# Altium PCB EP2C5T144C8.PcbDoc (part 1 of 2)
Units mm, origin at the board's own origin, x right, y up, seen from the top; angles counter-clockwise.
Board outline 85 x 80 mm, 2 copper layers (Top Layer, Bottom Layer); 74 components, 125 nets, 468 pads, 116 vias.
Unrouted connection lines stored in the file: 2.
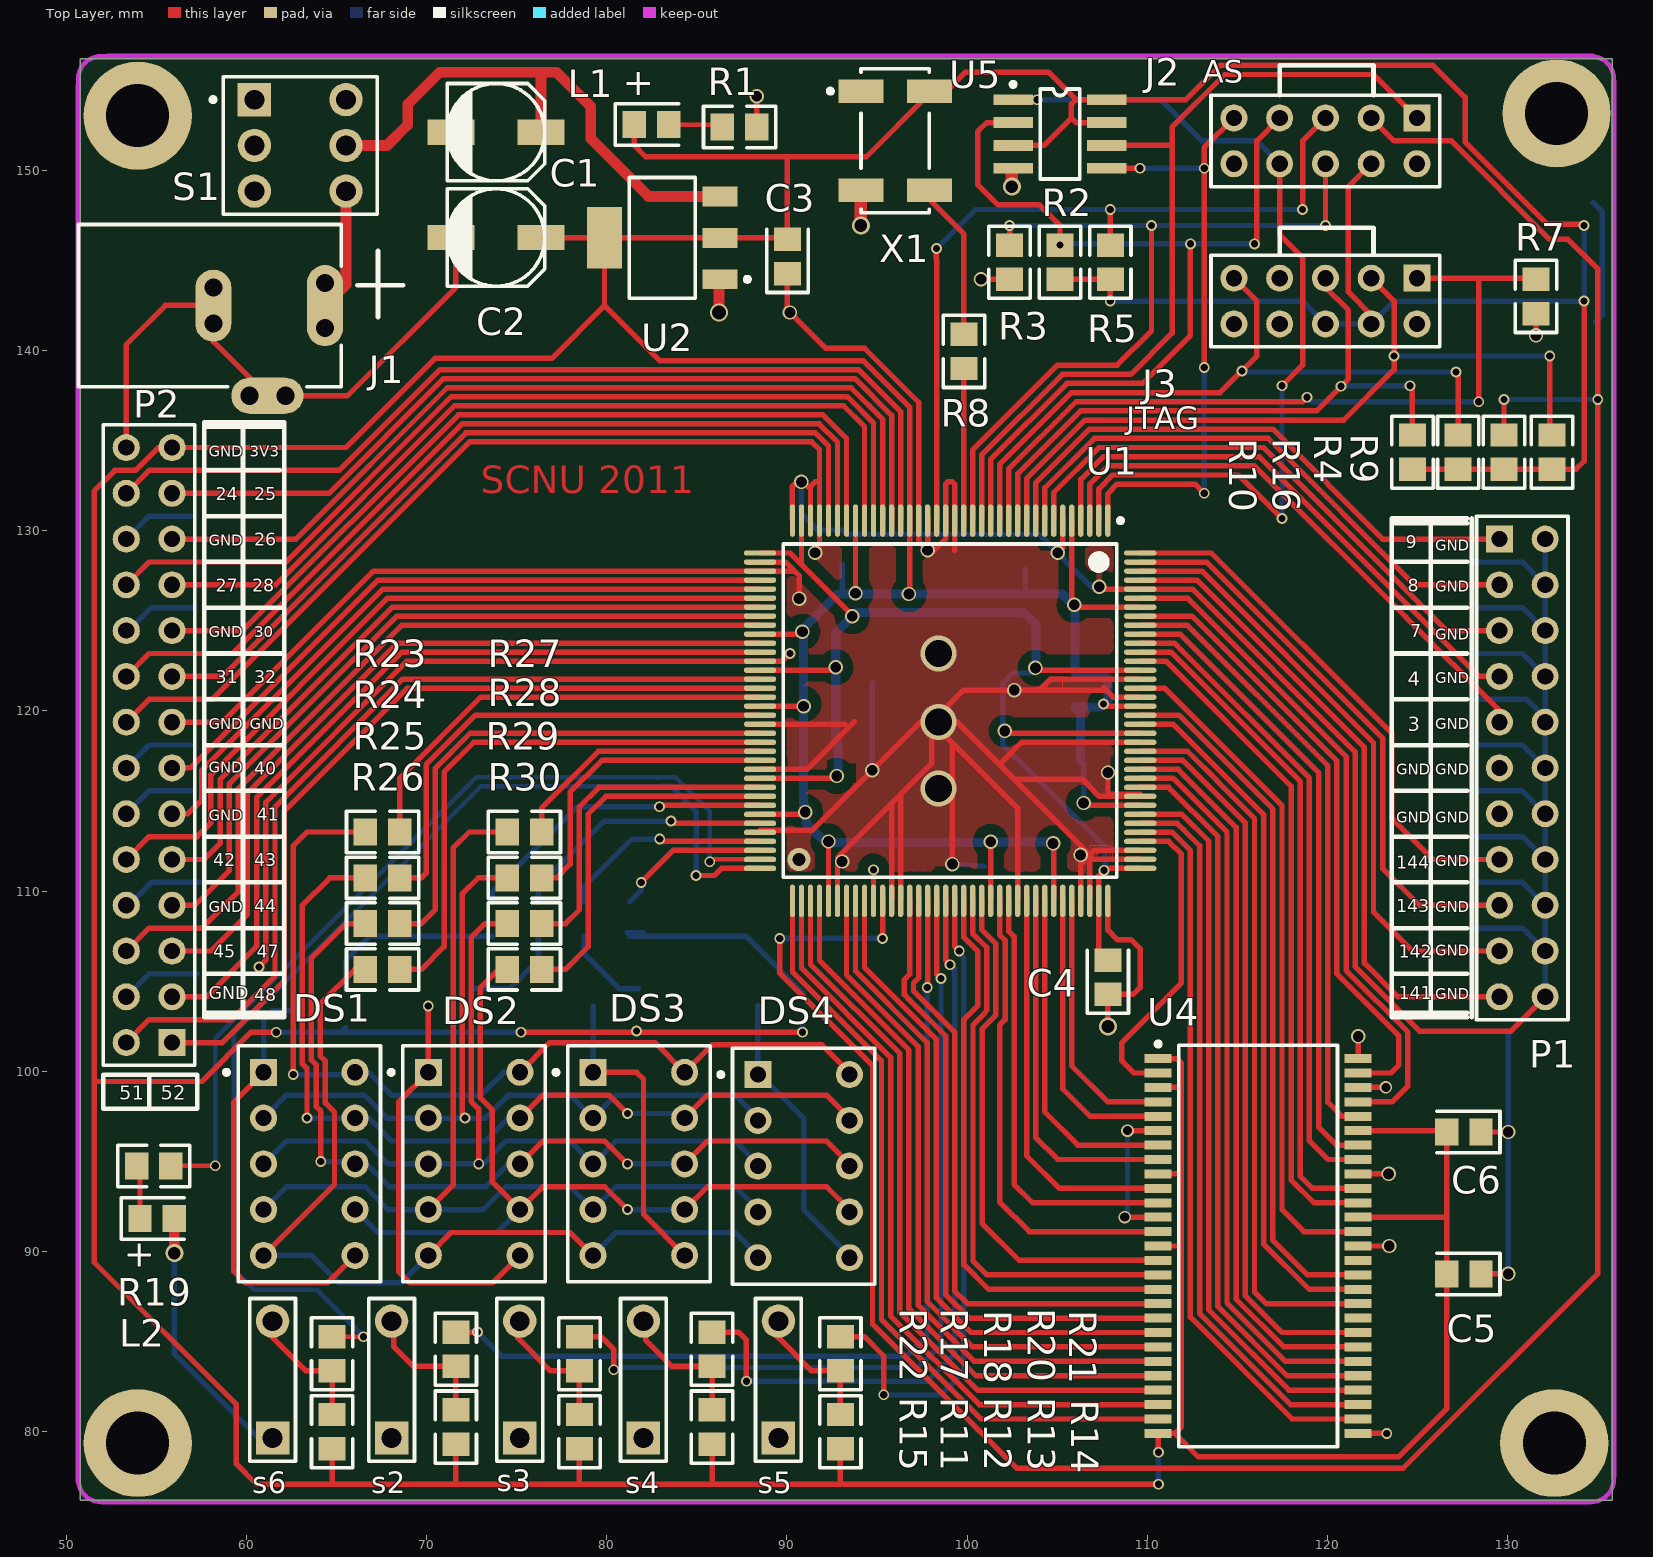
[diagram p0: Top Layer view]
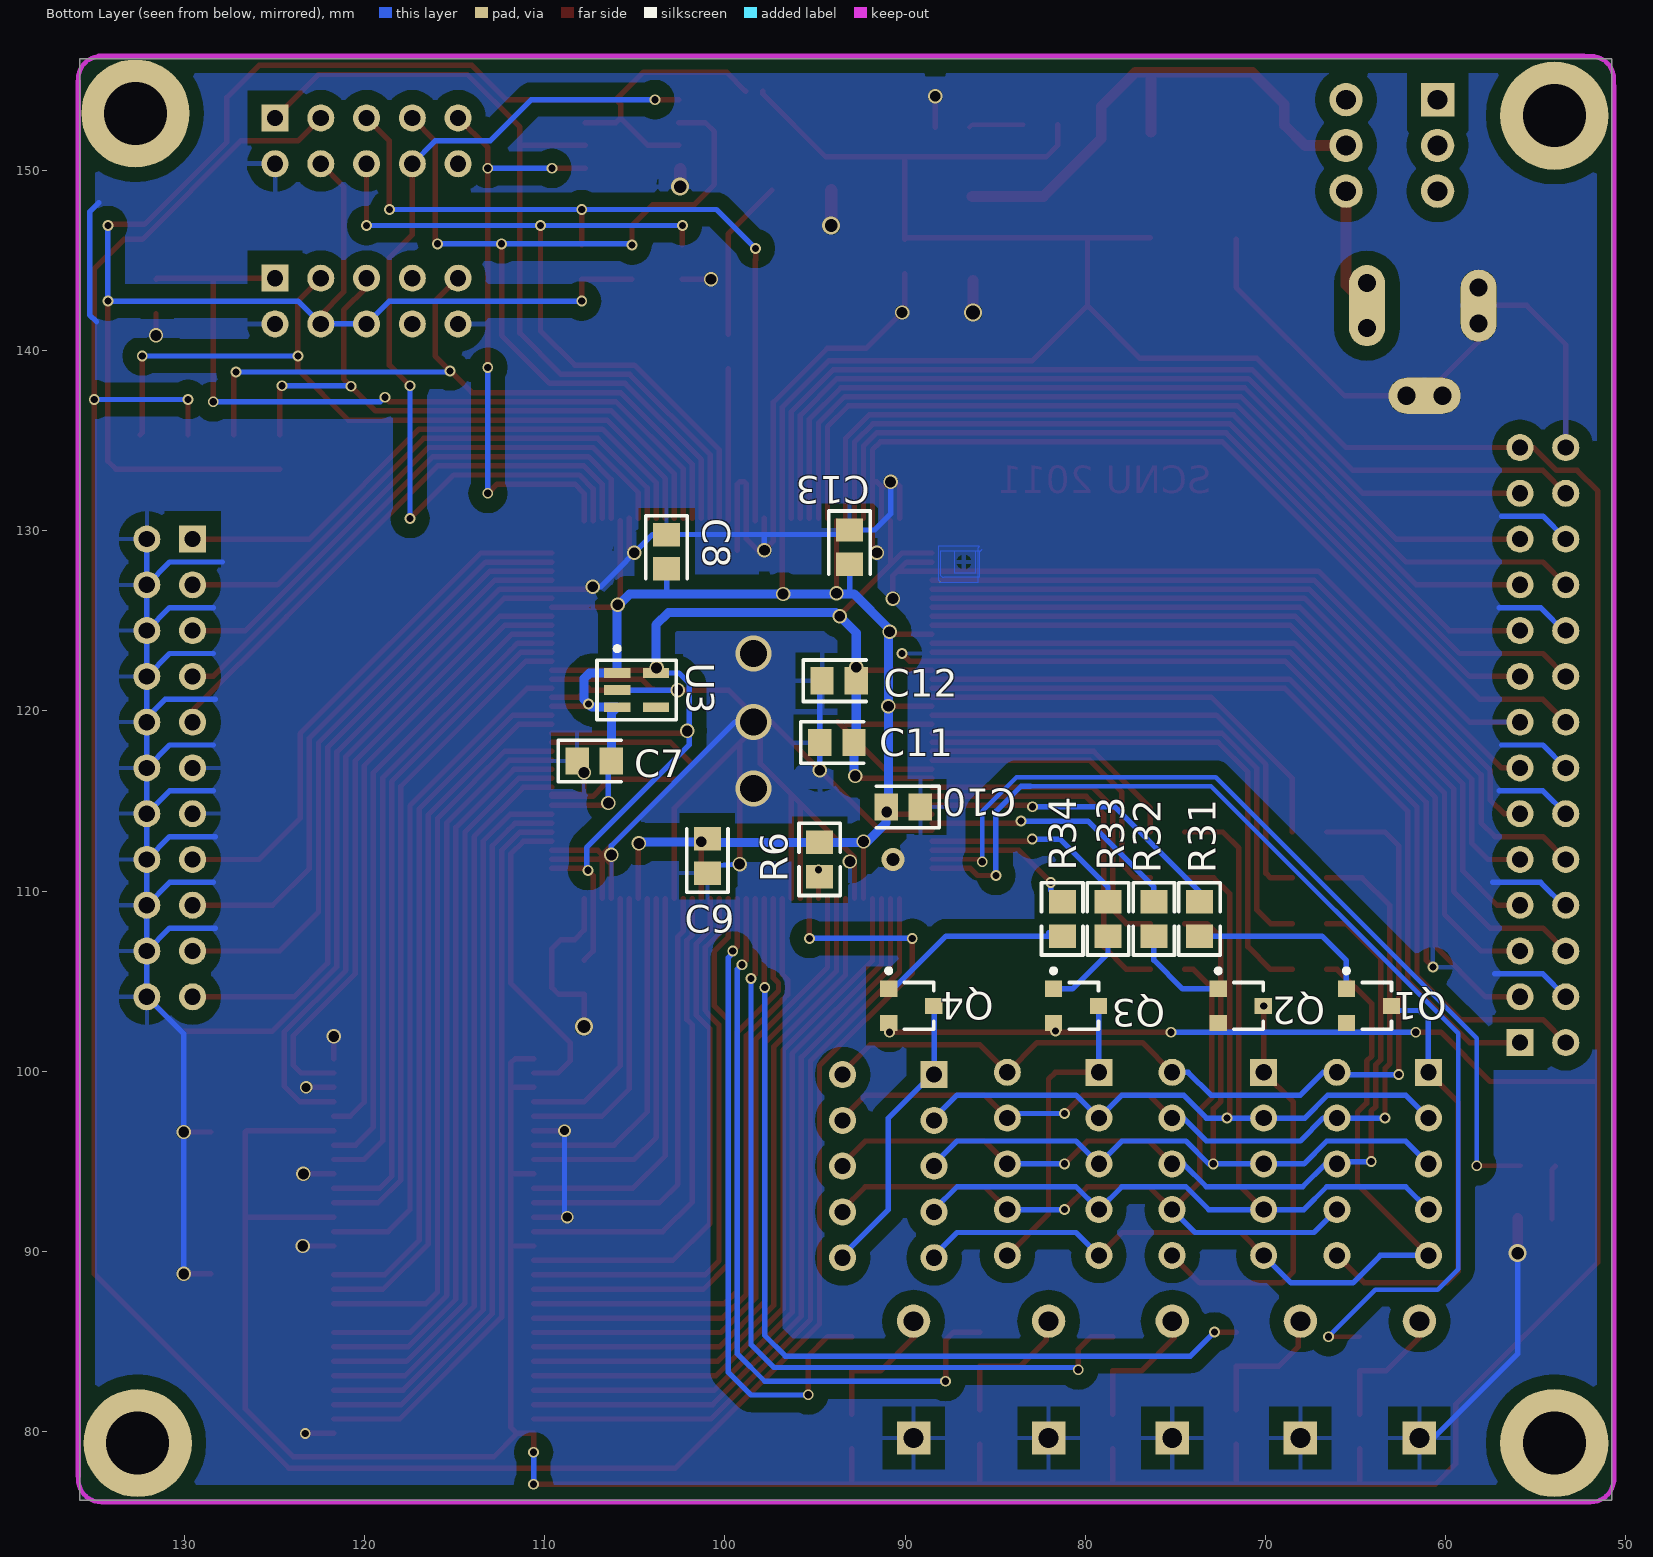
[diagram p1: Bottom Layer view, seen from below]

## Layer stack, top to bottom
Top Layer: signal copper 0.0356
Dielectric: dielectric 0.32, FR-4, Dk 4.8
Bottom Layer: signal copper 0.0356

## Board outline
50.8,76.2 135.8,76.2 135.8,156.2 50.8,156.2

## Design rules (kind name [scope] priority, off if disabled: settings)
Clearance [All] p1: gap=0
ComponentClearance [All] p1: gap=0.003 collisioncheckmode=3 verticalgap=0.003 showdistances=FALSE
PolygonConnect [All] p1: connectstyle=Relief reliefconductorwidth=0.254 reliefentries=4 polygonreliefangle="90 Angle"
RoutingVias [All] p1: holewidth=0.4 width=0.6 viastyle="Through Hole" minholewidth=0.4 minwidth=0.6 maxholewidth=3.5 maxwidth=6
SilkscreenOverComponentPads [All] p1: minsilkscreentomaskgap=0.254
SolderMaskExpansion [All] p1: expansion=0.102
TestPointUsage [All] p1: valid=0 allowmultiple=FALSE
Testpoint [All] p1: side=15 testpointundercomponent=TRUE minsize=1.016 maxsize=2.54 preferedsize=1.524 minholesize=0 maxholesize=1.016 preferedholesize=0.813 testpointgrid=0.025 style=1023 order=0-112345678
Width [All] p1: maxlimit=0.8 minlimit=0.254 preferedwidth=0.254
22 further rules are at their usual default settings.

## Components (designator, comment, footprint, x,y, rotation, side; value= is the part's Value field where it differs from the comment)
C1 "Cap Pol3" tanCap 76.962,152.146 r180 top
C2 "Cap Pol3" tanCap 76.962,146.304 r180 top
C3 "Cap Semi" CC2012-0805 90.424,144.018 r90 top
C4 "Cap Semi" CC2012-0805 108.204,104.013 r90 top
C5 "Cap Semi" CC2012-0805 128.778,89.154 r180 top
C6 "Cap Semi" CC2012-0805 128.778,97.028 r180 top
C7 "Cap Semi" CC2012-0805 108.458,116.84 r180 bottom
C8 "Cap Semi" CC2012-0805 103.632,130.048 r270 bottom
C9 "Cap Semi" CC2012-0805 100.584,110.744 r90 bottom
C10 "Cap Semi" CC2012-0805 88.9,115.062 r0 bottom
C11 "Cap Semi" CC2012-0805 94.996,117.856 r180 bottom
C12 "Cap Semi" CC2012-0805 94.869,121.285 r180 bottom
C13 "Cap" CC2012-0805 93.472,130.302 r270 bottom
DS1 "Dpy Yellow-CA" LEDDIP-10 63.5,94.869 r0 top
DS2 "Dpy Yellow-CA" LEDDIP-10 72.644,94.869 r0 top
DS3 "Dpy Yellow-CA" LEDDIP-10 81.788,94.869 r0 top
DS4 "Dpy Yellow-CA" LEDDIP-10 90.932,94.742 r0 top
J1 "PWR2.5" KLD-0202 50.673,142.494 r0 top
J2 "AS" JATG_XU 124.968,152.908 r180 top
J3 "JTAG" JATG_XU 124.968,144.018 r180 top
L1 "LED-3MM" CC2012-0805 81.28,152.146 r0 top
L2 "LED-3MM" CC2012-0805 53.848,91.44 r0 top
P1 "Header 11X2" HDR2X11 129.54,129.54 r270 top
P2 "Header 14X2" HDR2X14 55.88,101.6 r90 top
Q1 "2N3906" SOT-23 64.262,103.632 r270 bottom
Q2 "2N3906" SOT-23 71.374,103.632 r270 bottom
Q3 "2N3906" SOT-23 80.518,103.632 r270 bottom
Q4 "2N3906" SOT-23 89.662,103.632 r270 bottom
R1 "Res1" CR2012-0805 87.376,152.4 r180 top
R2 "Res Semi" CR2012-0805 105.156,144.907 r270 top
R3 "Res1" CR2012-0805 102.362,144.907 r270 top
R4 "Res1" CR2012-0805 129.794,134.366 r270 top
R5 "Res1" CR2012-0805 107.95,144.907 r270 top
R6 "Res1" CR2012-0805 94.742,111.76 r90 bottom
R7 "Res1" CR2012-0805 131.572,143.002 r270 top
R8 "Res1" CR2012-0805 99.822,139.954 r90 top
R9 "Res1" CR2012-0805 132.461,134.366 r270 top
R10 "Res1" CR2012-0805 124.714,134.366 r270 top
R11 "Res1" CR2012-0805 71.628,80.264 r90 top
R12 "Res1" CR2012-0805 78.486,80.01 r90 top
R13 "Res1" CR2012-0805 85.852,80.264 r90 top
R14 "Res1" CR2012-0805 92.964,80.01 r90 top
R15 "Res1" CR2012-0805 64.77,80.01 r90 top
R16 "Res1" CR2012-0805 127.254,134.366 r270 top
R17 "Res1" CR2012-0805 71.628,84.582 r270 top
R18 "Res1" CR2012-0805 78.486,84.328 r270 top
R19 "Res1" CR2012-0805 54.864,94.742 r180 top
R20 "Res1" CR2012-0805 85.852,84.582 r270 top
R21 "Res1" CR2012-0805 92.964,84.328 r270 top
R22 "Res1" CR2012-0805 64.77,84.328 r270 top
R23 "Res1" CR2012-0805 67.564,113.284 r180 top
R24 "Res1" CR2012-0805 67.564,110.744 r180 top
R25 "Res1" CR2012-0805 67.564,108.204 r180 top
R26 "Res1" CR2012-0805 67.564,105.664 r180 top
R27 "Res1" CR2012-0805 75.438,113.284 r180 top
R28 "Res1" CR2012-0805 75.438,110.744 r180 top
R29 "Res1" CR2012-0805 75.438,108.204 r180 top
R30 "Res1" CR2012-0805 75.438,105.664 r180 top
R31 "Res1" CR2012-0805 73.66,108.458 r270 bottom
R32 "Res1" CR2012-0805 76.2,108.458 r270 bottom
R33 "Res1" CR2012-0805 78.74,108.458 r270 bottom
R34 "Res1" CR2012-0805 81.28,108.458 r270 bottom
S1 "SW-DPDT" DPDT-6 62.992,151.384 r0 top
s2 "SW-SPST" SW2 68.072,79.756 r180 top
s3 "SW-SPST" SW2 75.184,79.756 r180 top
s4 "SW-SPST" SW2 82.042,79.756 r180 top
s5 "SW-SPST" SW2 89.535,79.756 r180 top
s6 "SW-SPST" SW2 61.468,79.756 r180 top
U1 "EP2C5T144C8N" TQFP144_N 99.06,120.015 r270 top
U2 "REG117" SOT223 85.598,148.336 r90 top
U3 "SPX3819" SO-G5/P.95 104.902,121.158 r270 bottom
U4 "HY57V641620ET-7" TSOP-54 110.49,100.838 r0 top
U5 "EPCS1SI8" SOIC8 105.156,152.019 r270 top
X1 "XTAL-S" DSO-N4 96.012,151.638 r270 top

## Footprints (in the part's own frame and the unit in brackets; to place one, negate y for a bottom-side part, rotate by r counter-clockwise, add the part's x,y. Pads: shape width x height; smd on the part's side, far side on the other; paste and mask are expansions set on the pad)
CC2012-0805 [mm]
  rect 1.3x1.5 smd: 1(0.256,0.394) 2(2.157,0.394)
  silkscreen extent -0.79,-0.76 2.71,1.54
CR2012-0805 [mm]
  rect 1.3x1.5 smd: 1(-0.95,0) 2(0.95,0)
  silkscreen extent -2,-1.15 2,1.15
DPDT-6 [mm] "Double-Pole, Double-Throw Switch; 6 Leads"
  rect 1.85x1.85 hole 1.1: 1(-2.54,2.54)
  round 1.85 hole 1.1: 2(-2.54,0) 3(-2.54,-2.54) 4(2.54,-2.54) 5(2.54,0) 6(2.54,2.54)
  silkscreen extent -4.96,-3.81 4.28,3.81
DSO-N4 [mm]
  rect 1.3x2.5 smd: 1(-2.75,-1.9) 2(2.75,-1.9) 3(2.75,1.9) 4(-2.75,1.9)
  silkscreen extent -4,-3.72 4,1.9
HDR2X11 [mm] "Connector; Header; 11x2 Position"
  rect 1.5x1.5 hole 0.9: 1(0,0)
  round 1.5 hole 0.9: 2(0,2.54) 3(2.54,0) 4(2.54,2.54) 5(5.08,0) 6(5.08,2.54) 7(7.62,0) 8(7.62,2.54) 9(10.16,0) 10(10.16,2.54) 11(12.7,0) 12(12.7,2.54) 13(15.24,0) 14(15.24,2.54) 15(17.78,0) 16(17.78,2.54) 17(20.32,0) 18(20.32,2.54) 19(22.86,0) 20(22.86,2.54) 21(25.4,0) 22(25.4,2.54)
  silkscreen extent -1.27,-1.27 26.67,3.81
HDR2X14 [mm] "Connector; Header; 14x2 Position"
  rect 1.5x1.5 hole 0.9: 1(0,0)
  round 1.5 hole 0.9: 2(0,2.54) 3(2.54,0) 4(2.54,2.54) 5(5.08,0) 6(5.08,2.54) 7(7.62,0) 8(7.62,2.54) 9(10.16,0) 10(10.16,2.54) 11(12.7,0) 12(12.7,2.54) 13(15.24,0) 14(15.24,2.54) 15(17.78,0) 16(17.78,2.54) 17(20.32,0) 18(20.32,2.54) 19(22.86,0) 20(22.86,2.54) 21(25.4,0) 22(25.4,2.54) 23(27.94,0) 24(27.94,2.54) 25(30.48,0) 26(30.48,2.54) 27(33.02,0) 28(33.02,2.54)
  silkscreen extent -1.27,-1.27 34.29,3.81
JATG_XU [mm]
  rect 1.5x1.5 hole 0.9: 1(0,0)
  round 1.5 hole 0.9: 2(0,2.54) 3(2.54,0) 4(2.54,2.54) 5(5.08,0) 6(5.08,2.54) 7(7.62,0) 8(7.62,2.54) 9(10.16,0) 10(10.16,2.54)
  silkscreen extent -1.27,-1.27 11.43,3.81
KLD-0202 [mm] "DC Power Jack, 2.5mm, KLD Series, PCB Mount"
  oval 2x4.5 all layers, no hole: 1(13.7,0)
  round 1.5 hole 1: 1A(13.7,-1.25) 1B(13.7,1.25) 2A(7.5,-1) 2B(7.5,1) 3A(9.5,-5) 3B(11.5,-5)
  oval 2x4 all layers, no hole: 2(7.5,0)
  oval 4x2 all layers, no hole: 3(10.5,-5)
  silkscreen extent 0,-4.5 14.6,4.5
LEDDIP-10 [mm] "LED, 7-Segment Display, 7.62 mm, RHD; 10 Leads; Row Space 5.08 mm; Pitch 2.54 mm"
  rect 1.5x1.5 hole 0.9: 1(-2.54,5.08)
  round 1.5 hole 0.9: 2(-2.54,2.54) 3(-2.54,0) 4(-2.54,-2.54) 5(-2.54,-5.08) 6(2.54,-5.08) 7(2.54,-2.54) 8(2.54,0) 9(2.54,2.54) 10(2.54,5.08)
  silkscreen extent -4.72,-6.55 3.95,6.55
SO-G5/P.95 [mm]
  rect 0.55x1.45 smd: 1(-0.95,-1.075) 2(0,-1.075) 3(0.95,-1.075) 4(0.95,1.075) 5(-0.95,1.075)
  silkscreen extent -2.42,-2.2 1.65,2.2
SOIC8 [mm] "8-Pin Small-Outline Integrated Circuit (SOIC)"
  rect 0.6x2.2 smd: 1(-1.905,-2.6) 2(-0.635,-2.6) 3(0.635,-2.6) 4(1.905,-2.6) 5(1.905,2.6) 6(0.635,2.6) 7(-0.635,2.6) 8(-1.905,2.6)
  silkscreen extent -2.88,-2.72 2.5,1.1
SOT223 [mm]
  rect 1.1x1.95 smd: 1(-4.38,-0.683) 2(-2.08,-0.683) 3(0.22,-0.683)
  rect 3.4x1.95 smd: 3(-2.08,5.717)
  silkscreen extent -5.43,-2.33 1.27,4.34
SOT-23 [mm] "SOT-23; 3 Leads; Body 3.0 x 2.6 mm, inc. leads (LxW max)"
  rect 0.9x0.95 smd: 1(-0.95,-1.25) 2(0.95,-1.25) 3(0,1.25)
  silkscreen extent -2.07,-1.38 1.3,1.25
SW2 [mm]
  rect 1.85x1.85 hole 1.1: 1(0.006,0.098)
  round 1.85 hole 1.1: 2(0.006,-6.382)
  silkscreen extent -1.26,-7.64 1.28,1.38
tanCap [mm]
  rect 2.6x1.4 smd: 1(0.599,0.025) 2(5.599,0.025)
  silkscreen extent 0.4,-2.67 5.8,2.73
TQFP144_N [mm] "Thin QFP, 144-Leads, Body 20x20mm, Pitch 0.5mm, IPC Medium Density"
  oval 1.8x0.3 smd: 1(-10.55,8.75) 2(-10.55,8.25) 3(-10.55,7.75) 4(-10.55,7.25) 5(-10.55,6.75) 6(-10.55,6.25) 7(-10.55,5.75) 8(-10.55,5.25) 9(-10.55,4.75) 10(-10.55,4.25) 11(-10.55,3.75) 12(-10.55,3.25) 13(-10.55,2.75) 14(-10.55,2.25) 15(-10.55,1.75) 16(-10.55,1.25) 17(-10.55,0.75) 18(-10.55,0.25) 19(-10.55,-0.25) 20(-10.55,-0.75) 21(-10.55,-1.25) 22(-10.55,-1.75) 23(-10.55,-2.25) 24(-10.55,-2.75) 25(-10.55,-3.25) 26(-10.55,-3.75) 27(-10.55,-4.25) 28(-10.55,-4.75) 29(-10.55,-5.25) 30(-10.55,-5.75) 31(-10.55,-6.25) 32(-10.55,-6.75) 33(-10.55,-7.25) 34(-10.55,-7.75) 35(-10.55,-8.25) 36(-10.55,-8.75) 73(10.55,-8.75) 74(10.55,-8.25) 75(10.55,-7.75) 76(10.55,-7.25) 77(10.55,-6.75) 78(10.55,-6.25) 79(10.55,-5.75) 80(10.55,-5.25) 81(10.55,-4.75) 82(10.55,-4.25) 83(10.55,-3.75) 84(10.55,-3.25) 85(10.55,-2.75) 86(10.55,-2.25) 87(10.55,-1.75) 88(10.55,-1.25) 89(10.55,-0.75) 90(10.55,-0.25) 91(10.55,0.25) 92(10.55,0.75) 93(10.55,1.25) 94(10.55,1.75) 95(10.55,2.25) 96(10.55,2.75) 97(10.55,3.25) 98(10.55,3.75) 99(10.55,4.25) 100(10.55,4.75) 101(10.55,5.25) 102(10.55,5.75) 103(10.55,6.25) 104(10.55,6.75) 105(10.55,7.25) 106(10.55,7.75) 107(10.55,8.25) 108(10.55,8.75)
  oval 0.3x1.8 smd: 37(-8.75,-10.55) 38(-8.25,-10.55) 39(-7.75,-10.55) 40(-7.25,-10.55) 41(-6.75,-10.55) 42(-6.25,-10.55) 43(-5.75,-10.55) 44(-5.25,-10.55) 45(-4.75,-10.55) 46(-4.25,-10.55) 47(-3.75,-10.55) 48(-3.25,-10.55) 49(-2.75,-10.55) 50(-2.25,-10.55) 51(-1.75,-10.55) 52(-1.25,-10.55) 53(-0.75,-10.55) 54(-0.25,-10.55) 55(0.25,-10.55) 56(0.75,-10.55) 57(1.25,-10.55) 58(1.75,-10.55) 59(2.25,-10.55) 60(2.75,-10.55) 61(3.25,-10.55) 62(3.75,-10.55) 63(4.25,-10.55) 64(4.75,-10.55) 65(5.25,-10.55) 66(5.75,-10.55) 67(6.25,-10.55) 68(6.75,-10.55) 69(7.25,-10.55) 70(7.75,-10.55) 71(8.25,-10.55) 72(8.75,-10.55) 109(8.75,10.55) 110(8.25,10.55) 111(7.75,10.55) 112(7.25,10.55) 113(6.75,10.55) 114(6.25,10.55) 115(5.75,10.55) 116(5.25,10.55) 117(4.75,10.55) 118(4.25,10.55) 119(3.75,10.55) 120(3.25,10.55) 121(2.75,10.55) 122(2.25,10.55) 123(1.75,10.55) 124(1.25,10.55) 125(0.75,10.55) 126(0.25,10.55) 127(-0.25,10.55) 128(-0.75,10.55) 129(-1.25,10.55) 130(-1.75,10.55) 131(-2.25,10.55) 132(-2.75,10.55) 133(-3.25,10.55) 134(-3.75,10.55) 135(-4.25,10.55) 136(-4.75,10.55) 137(-5.25,10.55) 138(-5.75,10.55) 139(-6.25,10.55) 140(-6.75,10.55) 141(-7.25,10.55) 142(-7.75,10.55) 143(-8.25,10.55) 144(-8.75,10.55)
  silkscreen extent -10.67,-9.25 9.25,9.58, body extent -10,-10 10,10, height 1.6
TSOP-54 [mm]
  rect 1.5x0.5 smd: 1(0.114,-0.128) 2(0.114,-0.928) 3(0.114,-1.728) 4(0.114,-2.528) 5(0.114,-3.328) 6(0.114,-4.128) 7(0.114,-4.928) 8(0.114,-5.728) 9(0.114,-6.528) 10(0.114,-7.328) 11(0.114,-8.128) 12(0.114,-8.928) 13(0.114,-9.728) 14(0.114,-10.528) 15(0.114,-11.328) 16(0.114,-12.128) 17(0.114,-12.928) 18(0.114,-13.728) 19(0.114,-14.528) 20(0.114,-15.328) 21(0.114,-16.128) 22(0.114,-16.928) 23(0.114,-17.728) 24(0.114,-18.528) 25(0.114,-19.328) 26(0.114,-20.128) 27(0.114,-20.928) 28(11.214,-20.928) 29(11.214,-20.128) 30(11.214,-19.328) 31(11.214,-18.528) 32(11.214,-17.728) 33(11.214,-16.928) 34(11.214,-16.128) 35(11.214,-15.328) 36(11.214,-14.528) 37(11.214,-13.728) 38(11.214,-12.928) 39(11.214,-12.128) 40(11.214,-11.328) 41(11.214,-10.528) 42(11.214,-9.728) 43(11.214,-8.928) 44(11.214,-8.128) 45(11.214,-7.328) 46(11.214,-6.528) 47(11.214,-5.728) 48(11.214,-4.928) 49(11.214,-4.128) 50(11.214,-3.328) 51(11.214,-2.528) 52(11.214,-1.728) 53(11.214,-0.928) 54(11.214,-0.128)
  silkscreen extent -0.01,-21.68 10.06,0.81

## Part data
C1 C2: "Polarized Capacitor (Surface Mount)"
C3 C4 C5 C6 C7 C8 C9 C10 C11 C12: "Capacitor (Semiconductor SIM Model)"
C13: "Capacitor"
DS1 DS2 DS3 DS4: "7.6 mm Micro Bright Yellow 7-Segment Display: CA, RH DP"
J1: "Low Voltage Power Supply Connector"
J2 J3: library part JTAG_XU
P1: "Header, 11-Pin, Dual row"
P2: "Header, 14-Pin, Dual row"
Q1 Q2 Q3 Q4: "PNP General Purpose Amplifier"
R1 R3 R4 R5 R6 R7 R8 R9 R10 R11 R12 R13 R14 R15 R16 R17 R18 R19 R20 R21 R22 R23 R24 R25 R26 R27 R28 R29 R30 R31 R32 R33 R34: "Resistor"
R2: "Semiconductor Resistor"
S1: "Double-Pole, Double-Throw Switch"
U1: "Cyclone II Family, 1.2V FPGA, 89 I/O Pins, 2 PLLs, 144-Pin TQFP, Speed Grade 8, Commercial Grade, Pb-Free"
U5: "EPCS1 Series, In-system programmable 3.3V configuration device, 8-Pin SOIC, 1-Megabit, Industrial Grade"

## Free pads (board coordinates)
  round 6 hole 3.5: 1(53.975,79.375) 1(53.975,153.035) 1(132.588,79.375) 1(132.715,153.162)

## Via types
v1: diameter 0.6, hole 0.4, Top Layer to Bottom Layer, 68 vias
v2: diameter 0.8, hole 0.6, Top Layer to Bottom Layer, 35 vias
v3: diameter 1, hole 0.7, Top Layer to Bottom Layer, 4 vias
v4: diameter 2, hole 1.5, Top Layer to Bottom Layer, 3 vias
v5: diameter 0.7, hole 0.5, Top Layer to Bottom Layer, 3 vias
v6: diameter 1.27, hole 0.711, Top Layer to Bottom Layer, 1 vias
v7: diameter 0.8, hole 0.6, Top Layer to Bottom Layer, tented bottom, 1 vias
v8: diameter 1, hole 0.8, Top Layer to Bottom Layer, 1 vias

## Nets (pads, with @x,y where several pads share a name; then routed paths per layer and width w, separated by ;. In a path a pad name is that pad's centre, name@x,y a point inside that pad or via, vN(x,y) a via of type N, cw(c..) or ccw(c..) an arc to the next point about the centre after c; other vN are vias at no path point)
A: DS1.10 DS2.10 DS3.10 DS4.10 R23.2 | length 51.4
  Top Layer w0.3: v1(62.603,99.822) 62.603,112.514 63.373,113.284 R23.2@66.614,113.284 ; DS2.10@75.184,99.949 76.835,101.6 82.677,101.6 DS3.10@84.328,99.949 85.852,101.473 91.948,101.473 DS4.10@93.472,99.949
  Bottom Layer w0.3: v1(62.603,99.822) DS1.10@65.913,99.822 ; DS1.10@66.04,99.949 66.802,99.949 68.072,98.679 73.025,98.679 74.295,99.949 75.112,99.949 DS2.10@75.184,99.949
A_B: R23.1 U1.53 | length 24.8
  Top Layer w0.3: R23.1@68.514,113.284 68.514,116.266 73.013,120.765 U1.53@88.51,120.765
ASDO: J2.9 U1.1 U5.5 | length 34.2
  Top Layer w0.3: U5.5@107.756,150.114 v1(109.601,150.114) ; U1.1@107.81,130.565 107.81,132.067 108.331,132.588 112.649,132.588 v1(113.157,132.08) ; v1(113.157,139.065) 113.157,151.257 J2.9@114.808,152.908
  Bottom Layer w0.3: v1(109.601,150.114) v1(113.157,150.114) ; v1(113.157,132.08) v1(113.157,139.065)
B: DS1.9 DS2.9 DS3.9 DS4.9 R24.2 | length 49.3
  Top Layer w0.3: v1(63.373,97.409) 63.373,100.171 63.103,100.441 63.103,109.212 64.635,110.744 R24.2@66.614,110.744 ; DS2.9@75.184,97.409 76.454,98.679 80.137,98.679 v1(81.153,97.663) ; DS3.9@84.328,97.409 85.598,98.679 92.202,98.679 DS4.9@93.472,97.409
  Bottom Layer w0.3: v1(63.373,97.409) DS1.9@66.04,97.409 66.802,97.409 68.072,96.139 73.279,96.139 74.549,97.409 DS2.9@75.184,97.409 ; v1(81.153,97.663) 84.074,97.663 DS3.9@84.328,97.409
B141: P1.21 U1.141 | length 36.5
  Top Layer w0.3: U1.141@109.61,127.265 112.765,127.265 113.249,126.781 122.047,117.983 122.047,106.007 123.914,104.14 P1.21@129.54,104.14
B142: P1.19 U1.142 | length 34.2
  Top Layer w0.3: U1.142@109.61,127.765 113.027,127.765 122.555,118.237 122.555,108.839 124.714,106.68 P1.19@129.54,106.68
B143: P1.17 U1.143 | length 32.1
  Top Layer w0.3: U1.143@109.61,128.265 113.289,128.265 123.063,118.491 123.063,111.252 125.095,109.22 P1.17@129.54,109.22
B144: P1.15 U1.144 | length 29.7
  Top Layer w0.3: U1.144@109.61,128.765 113.551,128.765 123.571,118.745 123.571,114.046 125.857,111.76 P1.15@129.54,111.76
B_B: R24.1 U1.55 | length 27.3
  Top Layer w0.3: R24.1@68.514,110.744 69.723,110.744 69.977,110.998 69.977,117.022 72.72,119.765 U1.55@88.51,119.765
C: DS1.8 DS2.8 DS3.8 DS4.8 R25.2 | length 47.7
  Top Layer w0.3: v1(64.135,94.996) 64.135,97.79 63.881,98.044 63.881,100.37 63.603,100.648 63.603,106.275 65.532,108.204 R25.2@66.614,108.204 ; DS2.8@75.184,94.869 76.454,96.139 79.883,96.139 v1(81.153,94.869) ; DS3.8@84.328,94.869 85.598,96.139 92.202,96.139 DS4.8@93.472,94.869
  Bottom Layer w0.3: v1(64.135,94.996) DS1.8@65.913,94.996 ; DS1.8@66.04,94.869 66.675,94.869 67.945,93.599 73.279,93.599 74.549,94.869 DS2.8@75.184,94.869 ; v1(81.153,94.869) DS3.8@84.328,94.869
C_B: R25.1 U1.57 | length 29
  Top Layer w0.3: R25.1@68.514,108.204 69.723,108.204 70.477,108.958 70.477,116.815 72.427,118.765 U1.57@88.51,118.765
CONF_DONE: J2.3 R4.1 U1.83 | length 158.5
  Top Layer w0.3: v1(89.602,107.382) 89.602,105.47 94.75,100.322 94.75,85.971 100.602,80.119 102.743,77.978 124.206,77.978 135.001,88.773 135.001,144.526 133.35,146.177 132.334,146.177 126.873,151.638 123.698,151.638 J2.3@122.428,152.908 ; v1(95.31,107.382) U1.83@95.31,109.592 ; R4.1@129.794,135.316 v1(129.794,137.287)
  Bottom Layer w0.3: v1(89.602,107.382) v1(95.31,107.382) ; v1(129.794,137.287) v1(135.001,137.287)
D: DS1.5 DS2.5 DS3.5 DS4.5 R26.2 | length 50
  Top Layer w0.3: DS1.5@60.96,89.789 64.897,93.726 64.897,97.735 64.389,98.243 64.389,100.569 64.103,100.855 64.103,103.743 66.024,105.664 R26.2@66.614,105.664 ; DS2.5@70.104,89.789 71.374,91.059 77.978,91.059 DS3.5@79.248,89.789
  Bottom Layer w0.3: DS1.5@60.96,89.789 63.627,89.789 65.151,88.265 68.58,88.265 DS2.5@70.104,89.789 ; DS3.5@79.248,89.789 80.518,91.059 87.122,91.059 DS4.5@88.392,89.789
D1V2: C4.2 C11.2 C12.2 U1.35 U1.37 U1.50 U1.62 U1.107 U1.109 U1.124 U1.131 U3.5 | length 75.3
  Top Layer w0.3: U1.62@88.51,116.265 92.643,116.265 v2(92.77,116.392) ; U1.50@88.51,122.265 92.547,122.265 v2(92.71,122.428) ; U1.37@88.51,128.765 90.183,128.765 v2@93.599,125.349 ; 90.81,128.138 U1.35@90.81,130.565 ; v2(102.088,118.892) 102.215,118.765 U1.124@109.61,118.765 ; v2(103.795,122.392) 103.922,122.265 U1.131@109.61,122.265 ; C4.2@107.81,106.17 107.31,106.67 107.31,110.866 107.709,111.265 U1.109@109.61,111.265
  Bottom Layer w0.3: C11.2@92.712,118.377 C11.2@92.837,118.252 ; U3.5@103.827,122.108 102.55,122.108 101.981,121.539 101.981,118.11 107.677,112.414 v1@107.677,111.233
  Bottom Layer w0.5: C11.2@92.712,118.377 92.712,124.335 93.853,125.476 103.124,125.476 103.827,124.773 v2@103.827,122.392 ; v2@92.837,116.459 C11.2@92.837,118.252
  other v1: 107.6,111.156
  other v2: 93.632,125.255
D3V3: C2.1 C3.2 C5.2 C6.2 C7.2 C8.2 C9.2 C10.2 C13.2 J2.4 J3.4 J3.6 L1.1 P2.27 Q1.2 Q2.2 Q3.2 Q4.2 R2.2 R4.2 R5.2 R6.2 R9.2 R10.2 R11.1 R12.1 R13.1 R14.1 R15.1 R16.2 U1.5 U1.23 U1.29 U1.46 U1.54 U1.66 U1.77 U1.95 U1.102 U1.116 U1.127 U1.138 U2.2 U2.3@79.881,146.256 U3.1 U3.3 U4.1 U4.3 U4.9 U4.14 U4.27 U4.43 U4.49 U5.3 U5.7 U5.8 X1.4 | length 563.8
  Top Layer w0.3: 51.562,99.441 57.531,99.441 60.264,102.174 v1(61.661,102.174) ; 55.118,134.62 53.848,133.35 52.705,133.35 51.562,132.207 51.562,89.408 59.436,81.534 59.436,78.232 60.579,77.089 v1(110.617,77.089) ; P2.27@55.88,134.62 65.532,134.62 70.485,139.573 76.958,139.573 79.881,142.496 ; 64.77,77.089 R15.1@64.77,79.06 ; 71.628,77.089 R11.1@71.628,79.314 ; v1(75.245,102.169) v1(90.866,102.169) ; C2.1@76.386,146.256 U2.3@79.881,146.256 ; 78.486,77.089 R12.1@78.486,79.06 ; L1.1@81.536,152.54 81.536,151.382 82.169,150.749 90.018,150.749 ; 85.852,77.089 R13.1@85.852,79.314 ; U1.66@88.51,114.265 90.897,114.265 v2(91.024,114.392) ; U1.54@88.51,120.265 v2(90.928,120.265) ; U1.46@88.51,124.265 90.737,124.265 v2(90.864,124.392) ; C3.2@89.949,146.256 U2.3@79.881,146.256 ; C3.2@90.03,146.175 90.03,150.736 ; 90.043,150.749 94.405,150.749 97.912,154.256 X1.4@97.912,154.388 ; U1.77@92.31,109.592 v2@92.31,112.63 ; R14.1@92.964,79.06 92.964,77.216 93.091,77.089 ; v2(93.81,126.535) U1.29@93.81,130.565 ; v2@96.81,126.528 96.81,136.87 94.234,139.446 82.931,139.446 79.881,142.496 ; X1.4@98.85,154.388 99.91,155.448 104.521,155.448 106.045,153.924 ; U1.95@101.31,109.592 v2(101.31,112.74) ; U5.3@102.556,151.384 104.267,151.384 105.791,152.908 ; v2(104.775,112.649) 104.81,112.614 U1.102@104.81,109.592 ; R2.2@105.156,143.957 R5.2@107.95,143.957 v1(107.95,142.748) ; U1.5@105.81,130.565 105.81,126.035 106.08,125.765 U1.138@109.61,125.765 ; v7@106.596,114.765 U1.116@109.61,114.765 ; v1(107.573,120.392) 107.7,120.265 U1.127@109.61,120.265 ; U5.7@107.756,152.654 106.045,152.654 105.791,152.908 ; U4.27@110.604,79.91 111.533,79.91 ; U4.14@110.604,90.31 111.874,90.31 ; U4.9@110.604,94.31 111.836,94.31 111.887,94.361 ; U4.3@110.604,99.11 111.837,99.11 111.887,99.06 ; U4.1@110.604,100.71 111.634,100.71 111.887,100.457 ; v1(110.617,78.867) U4.27@110.617,79.897 ; U4.43@121.704,91.91 126.583,91.91 ; U4.49@121.704,96.71 126.546,96.71 C6.2@126.621,96.634 ; J3.4@122.428,141.478 122.428,141.986 121.158,143.256 121.158,149.098 J2.4@122.428,150.368 ; R10.2@124.714,133.416 133.797,133.416 134.239,133.858 v1(134.239,142.748) ; R4.2@129.794,133.416 R4.2@129.799,133.411 ; v1(134.239,146.939) 134.173,147.005 132.213,147.005 127.635,151.583 127.635,154.051 125.857,155.829 114.046,155.829 112.141,153.924 106.045,153.924 ; 79.881,142.496 U2.3@79.881,146.256 ; 105.791,152.908 105.791,153.67 106.045,153.924 ; 111.533,79.91 111.887,80.264 ; 111.533,79.91 112.829,78.613 123.952,78.613 126.621,81.282 C5.2@126.621,88.76 ; 111.887,80.264 111.887,94.361 ; 111.887,80.264 111.887,94.361 ; 111.887,94.361 111.887,99.06 ; 111.887,99.06 111.887,100.457 ; 111.887,99.06 111.887,100.457 ; C5.2@126.621,88.76 C6.2@126.621,96.634 ; C5.2@126.621,88.76 C6.2@126.621,96.634
  Bottom Layer w0.3: v1(61.661,102.174) 70.861,102.174 70.866,102.169 v1(75.245,102.169) ; 65.258,102.174 Q1.2@65.512,102.428 ; v1(90.866,102.169) 90.866,102.636 Q4.2@90.912,102.682 ; C10.2@90.932,114.793 C10.2@91.059,114.666 ; 93.078,126.606 C13.2@93.078,128.145 ; C9.2@100.787,112.71 C9.2@100.853,112.776 ; v2(101.31,112.74) C9.2@101.401,112.649 ; 103.238,126.505 C8.2@103.238,127.891 ; C7.2@106.301,117.234 106.469,117.066 v7(106.469,114.892) ; v1(107.95,142.748) 118.618,142.748 J3.6@119.888,141.478 J3.4@122.428,141.478 123.698,142.748 v1(134.239,142.748) v1(134.239,146.939) ; v1@110.617,77.343 v1(110.617,78.867)
  Bottom Layer w0.5: C10.2@90.932,114.793 90.932,124.587 92.837,126.492 105.283,126.492 105.977,125.798 U3.1@105.977,122.108 107.508,122.108 107.823,121.793 107.823,120.65 107.381,120.208 U3.3@105.977,120.208 106.301,119.884 C7.2@106.301,117.234 ; C10.2@91.059,114.666 91.059,113.792 92.141,112.71 C9.2@100.787,112.71 ; v2(101.31,112.74) v2@104.684,112.74
  other v1: 81.661,102.235
  other v2: 92.31,112.757 105.953,125.892 96.774,126.492
D_B: R26.1 U1.58 | length 30.9
  Top Layer w0.3: R26.1@68.514,105.664 69.723,105.664 70.977,106.918 70.977,116.608 72.634,118.265 U1.58@88.51,118.265
DATA0: J2.7 R2.1 U1.14 U5.2 | length 52.5
  Top Layer w0.3: U1.14@101.31,130.692 101.31,133.949 105.537,138.176 109.728,138.176 112.395,140.843 v1(112.395,145.923) v1@112.522,145.923 ; U5.2@102.556,152.654 101.092,152.654 100.584,152.146 100.584,149.225 101.727,148.082 104.013,148.082 105.156,146.939 v1(105.156,145.857) ; v1(115.951,145.923) 116.078,146.05 116.078,151.638 J2.7@117.348,152.908
  Bottom Layer w0.3: v1(105.156,145.857) 105.222,145.923 v1(115.951,145.923)
DCLK: J2.1 U1.15 U5.6 | length 47.7
  Top Layer w0.3: U1.15@100.81,130.692 100.81,134.211 105.283,138.684 109.093,138.684 111.379,140.97 111.379,152.4 114.3,155.321 122.555,155.321 J2.1@124.968,152.908 ; U5.6@107.756,151.384 111.379,151.384
DGND: C1.2 C2.2 C3.1 C4.1 C5.1 C6.1 C7.1 C8.1 C9.1 C10.1 C11.1 C12.1 C13.1 J1.2 J1.2A J1.2B J1.3 J1.3A J1.3B J2.2 J2.10 J3.2 J3.10 L2.2 P1.2 P1.4 P1.6 P1.8 P1.10 P1.11 P1.12 P1.13 P1.14 P1.16 P1.18 P1.20 P1.22 P2.4 P2.8 P2.12 P2.14 P2.15 P2.16 P2.20 P2.24 P2.28 R1.1 R3.2 R7.2 s2.1 s3.1 s4.1 s5.1 s6.1 U1.6 U1.18 U1.19 U1.21 U1.22 U1.33 U1.34 U1.36 U1.38 U1.39 U1.49 U1.56 U1.61 U1.68 U1.78 U1.84 U1.85 U1.98 U1.105 U1.106 U1.108 U1.110 U1.111 U1.117 U1.123 U1.128 U1.130 U1.140 U2.1 U3.2 U4.6 U4.12 U4.28 U4.41 U4.46 U4.52 U4.54 U5.4 X1.2 | length 581.6
  Top Layer w0.3: P2.16@53.34,119.38 54.61,120.65 58.108,120.65 72.396,134.938 91.379,134.938 91.81,134.507 91.81,129.021 v2(91.567,128.778) ; P2.28@53.34,134.62 53.34,140.335 55.515,142.51 58.173,142.51 58.173,140.494 J1.3@60.673,137.994 ; P2.15@55.88,119.38 58.674,119.38 67.059,127.765 90.421,127.765 ; J1.2@58.173,140.51 60.173,138.51 ; v1(60.706,105.791) 61.087,106.172 61.087,114.935 68.917,122.765 89.745,122.765 v1(90.17,123.19) ; J1.3@61.173,137.494 65.612,137.494 71.628,143.51 C2.2@71.628,146.177 ; R1.1@88.326,152.4 v2(88.326,154.117) ; U1.68@88.51,113.392 91.421,113.392 97.421,119.392 ; U1.61@88.51,116.765 91.111,116.765 93.738,119.392 ; U1.56@88.51,119.265 93.206,119.265 ; U1.38@88.51,128.265 89.921,128.265 90.678,127.508 v2(90.678,126.238) ; C3.1@90.03,144.274 90.03,142.253 92.163,140.12 94.322,140.12 97.31,137.132 97.31,129.425 v2(97.81,128.925) ; U1.36@90.297,130.705 90.297,132.461 90.551,132.715 90.926,132.715 91.31,132.331 ; U1.34@91.31,130.692 91.31,132.458 91.567,132.715 91.81,132.715 ; U1.78@92.81,109.592 92.81,111.86 98.032,117.082 v4@98.032,119.392 ; U1.84@95.81,109.592 95.81,114.756 ; U1.85@96.31,109.592 96.31,115.36 ; U1.21@97.81,130.692 v2(97.81,128.925) ; v2(99.187,111.506) 99.187,118.237 ; 99.31,128.909 99.31,132.592 99.187,132.715 98.933,132.715 98.81,132.592 98.81,129.544 98.191,128.925 v2(97.81,128.925) ; 99.429,119.392 106.685,112.136 106.685,111.892 106.31,111.517 U1.105@106.31,109.592 ; v2@100.518,143.957 R3.2@102.362,143.957 ; 101.854,117.094 103.025,118.265 U1.123@109.61,118.265 ; 102.602,116.219 106.412,116.219 106.747,115.884 ; U1.98@102.81,109.592 102.81,114.614 v4@98.032,119.392 ; 103.886,121.158 103.95,121.221 ; 104.013,121.158 104.62,121.765 U1.130@109.61,121.765 ; v2(105.029,128.778) 105.31,129.059 U1.6@105.31,130.692 ; 106.73,115.866 107.331,115.265 U1.117@109.61,115.265 ; U1.106@106.81,109.592 106.81,111.949 ; 106.81,111.892 106.867,111.892 ; v2(107.334,126.892) 107.461,126.765 112.503,126.765 121.539,117.729 121.539,105.808 125.112,102.235 130.175,102.235 P1.22@132.08,104.14 ; 107.573,121.158 99.798,121.158 v4@98.032,119.392 ; 107.573,121.3 108.108,120.765 U1.128@109.61,120.765 ; U1.108@107.81,109.592 107.81,107.836 108.331,107.315 109.093,107.315 109.601,106.807 109.601,104.648 109.222,104.269 C4.1@107.81,104.269 107.81,102.502 v3(107.823,102.489) ; v2(107.823,116.586) 107.823,115.392 U1.117@109.61,115.392 ; v5(108.75,91.91) U4.12@110.604,91.91 ; v5(108.903,96.71) U4.6@110.604,96.71 ; U1.110@109.61,111.765 106.994,111.765 106.776,111.983 107.058,112.265 U1.111@109.61,112.265 ; U4.28@121.704,79.91 v1(123.29,79.91) ; U4.41@121.704,90.31 v2(123.431,90.31) ; U4.46@121.704,94.31 v2(123.393,94.31) ; U4.52@121.704,99.11 v5(123.24,99.11) ; U4.54@121.704,100.71 v2(121.704,101.943) ; C5.1@128.522,88.76 v2(130.035,88.76) ; C6.1@128.522,96.634 v2(130.035,96.634) ; v2(131.572,140.843) R7.2@131.572,142.052
  Top Layer w0.6: v3@56.005,89.918 L2.2@56.005,91.834 ; v8(86.233,142.113) U2.1@86.233,143.908
  Top Layer w0.7: v3(94.107,146.939) X1.2@94.107,148.883 ; v3(102.489,149.098) U5.4@102.489,150.047
  Bottom Layer w0.3: P2.4@53.34,104.14 54.61,105.41 57.277,105.41 ; P2.8@53.34,109.093 54.737,110.49 57.404,110.49 ; P2.12@53.34,114.3 54.61,115.57 57.023,115.57 ; P2.14@53.34,116.84 54.61,118.11 56.896,118.11 ; P2.20@53.34,124.333 54.737,125.73 57.023,125.73 ; P2.24@53.34,129.54 54.61,130.81 56.896,130.81 ; v3(56.007,89.916) 56.007,84.328 s6.1@61.468,78.867 ; v2(90.805,132.715) 90.805,130.937 91.696,130.046 C13.1@93.078,130.046 93.332,129.792 104.015,129.792 106.915,126.892 v2(107.334,126.892) ; v2(94.74,116.715) C12.1@94.74,121.552 ; v2(97.81,128.925) 97.81,129.771 ; v4(98.425,119.38) 99.441,119.38 106.299,112.522 v2(106.299,112.014) ; v2(99.187,111.506) C9.1@100.965,111.379 ; v2(102.616,121.158) U3.2@105.977,121.158 ; v5(108.75,91.91) 108.903,92.063 v5(108.903,96.71) ; 127.889,128.27 130.81,128.27 P1.4@132.08,127 ; 128.27,107.95 130.81,107.95 P1.20@132.08,106.68 ; 128.27,113.03 130.81,113.03 P1.16@132.08,111.76 ; 128.27,120.65 131.064,120.65 P1.10@132.334,119.38 ; 128.397,110.49 130.81,110.49 P1.18@132.08,109.22 ; 128.397,115.57 130.81,115.57 P1.14@132.08,114.3 ; 128.397,118.11 130.81,118.11 P1.12@132.08,116.84 ; 128.397,123.19 130.81,123.19 P1.8@132.08,121.92 ; 128.397,125.73 130.81,125.73 P1.6@132.08,124.46 ; v2(130.035,88.76) 130.035,102.095 P1.22@132.08,104.14 P1.10@132.08,119.38 P1.2@132.08,129.54 ; 134.747,148.209 135.255,147.701 135.255,141.986 134.874,141.605
  other v2: 93.066,111.647 90.17,142.113 100.772,143.957
  other v4: 98.425,115.697 98.425,123.19
  other v6: 90.678,111.76
DP: DS1.7 DS2.7 DS3.7 DS4.7 R30.2 | length 45.7
  Top Layer w0.3: R30.2@74.488,105.664 74.001,105.664 72.977,104.64 72.977,98.545 73.66,97.862 73.66,93.853 DS2.7@75.184,92.329 76.454,93.599 79.883,93.599 v1(81.153,92.329) ; DS3.7@84.328,92.329 85.598,93.599 92.202,93.599 DS4.7@93.472,92.329
  Bottom Layer w0.3: DS1.7@66.04,92.329 67.31,91.059 73.914,91.059 DS2.7@75.184,92.329 ; v1(81.153,92.329) DS3.7@84.328,92.329
DP_B: R30.1 U1.64 | length 20.4
  Top Layer w0.3: R30.1@76.388,105.664 77.724,105.664 78.978,106.918 78.978,114.284 79.959,115.265 U1.64@88.51,115.265
E: DS1.4 DS2.4 DS3.4 DS4.4 R27.2 | length 54.6
  Top Layer w0.3: DS2.4@70.104,92.329 71.477,93.702 71.477,112.387 72.374,113.284 R27.2@74.488,113.284
  Bottom Layer w0.3: DS1.4@60.96,92.329 62.23,93.599 66.603,93.599 67.873,92.329 DS2.4@70.104,92.329 73.152,92.329 74.422,93.599 77.978,93.599 DS3.4@79.248,92.329 80.518,93.599 87.122,93.599 DS4.4@88.392,92.329
E_B: R27.1 U1.59 | length 14.8
  Top Layer w0.3: R27.1@76.388,113.284 76.388,114.615 79.538,117.765 U1.59@88.51,117.765
F: DS1.2 DS2.2 DS3.2 DS4.2 R28.2 | length 45.7
  Top Layer w0.3: v1(72.136,97.409) 71.977,97.568 71.977,109.847 72.874,110.744 R28.2@74.488,110.744
  Bottom Layer w0.3: DS1.2@60.96,97.409 62.23,98.679 66.548,98.679 67.818,97.409 DS2.2@70.104,97.409 ; DS2.2@70.358,97.409 v1(72.136,97.409) 73.279,97.409 74.549,98.679 77.978,98.679 DS3.2@79.248,97.409 80.518,98.679 87.122,98.679 DS4.2@88.392,97.409
F_B: R28.1 U1.60 | length 17.2
  Top Layer w0.3: R28.1@76.388,110.744 77.216,110.744 77.978,111.506 77.978,115.498 79.745,117.265 U1.60@88.51,117.265
G: DS1.3 DS2.3 DS3.3 DS4.3 R29.2 | length 45.7
  Top Layer w0.3: v1(72.898,94.869) 72.898,97.917 72.477,98.338 72.477,107.426 73.255,108.204 R29.2@74.488,108.204
  Bottom Layer w0.3: DS1.3@60.96,94.869 62.23,96.139 66.603,96.139 67.873,94.869 DS2.3@70.104,94.869 v1(72.898,94.869) 73.152,94.869 74.422,96.139 77.978,96.139 DS3.3@79.248,94.869 80.518,96.139 87.122,96.139 DS4.3@88.392,94.869
G_B: R29.1 U1.63 | length 18.6
  Top Layer w0.3: R29.1@76.388,108.204 77.724,108.204 78.478,108.958 78.478,114.673 79.57,115.765 U1.63@88.51,115.765
KEY1: R17.1 U1.88 | length 51.4
  Top Layer w0.3: R17.1@71.628,85.532 v1(72.832,85.532) ; v1(97.79,104.648) 97.81,104.668 U1.88@97.81,109.592
  Bottom Layer w0.3: v1(72.832,85.532) 74.163,84.201 96.647,84.201 97.79,85.344 v1(97.79,104.648)
KEY2: R18.1 U1.89 | length 46.6
  Top Layer w0.3: R18.1@78.486,85.278 79.695,85.278 80.391,84.582 v1(80.391,83.439) ; 98.31,105.398 U1.89@98.31,109.592
  Bottom Layer w0.3: v1(80.391,83.439) 80.518,83.566 97.282,83.566 98.552,84.836 v1(98.552,105.156)
KEY3: R20.1 U1.90 | length 41.7
  Top Layer w0.3: R20.1@85.852,85.532 87.315,85.532 87.757,85.09 v1(87.757,82.804) ; 98.81,106.168 U1.90@98.81,109.592
  Bottom Layer w0.3: v1(87.757,82.804) 97.79,82.804 99.314,84.328 99.314,105.664 v1(99.06,105.918)